# Altium PCB ESP32_LED_Matrix_Unrouted.PcbDoc
Units mm, origin at the board's own origin, x right, y up, seen from the top; angles counter-clockwise.
Board outline 83 x 52.3 mm, 2 copper layers (Top Layer, Bottom Layer), stack 1.671 mm thick; 168 components, 98 nets, 513 pads, 0 vias.
Unrouted connection lines stored in the file: 401.
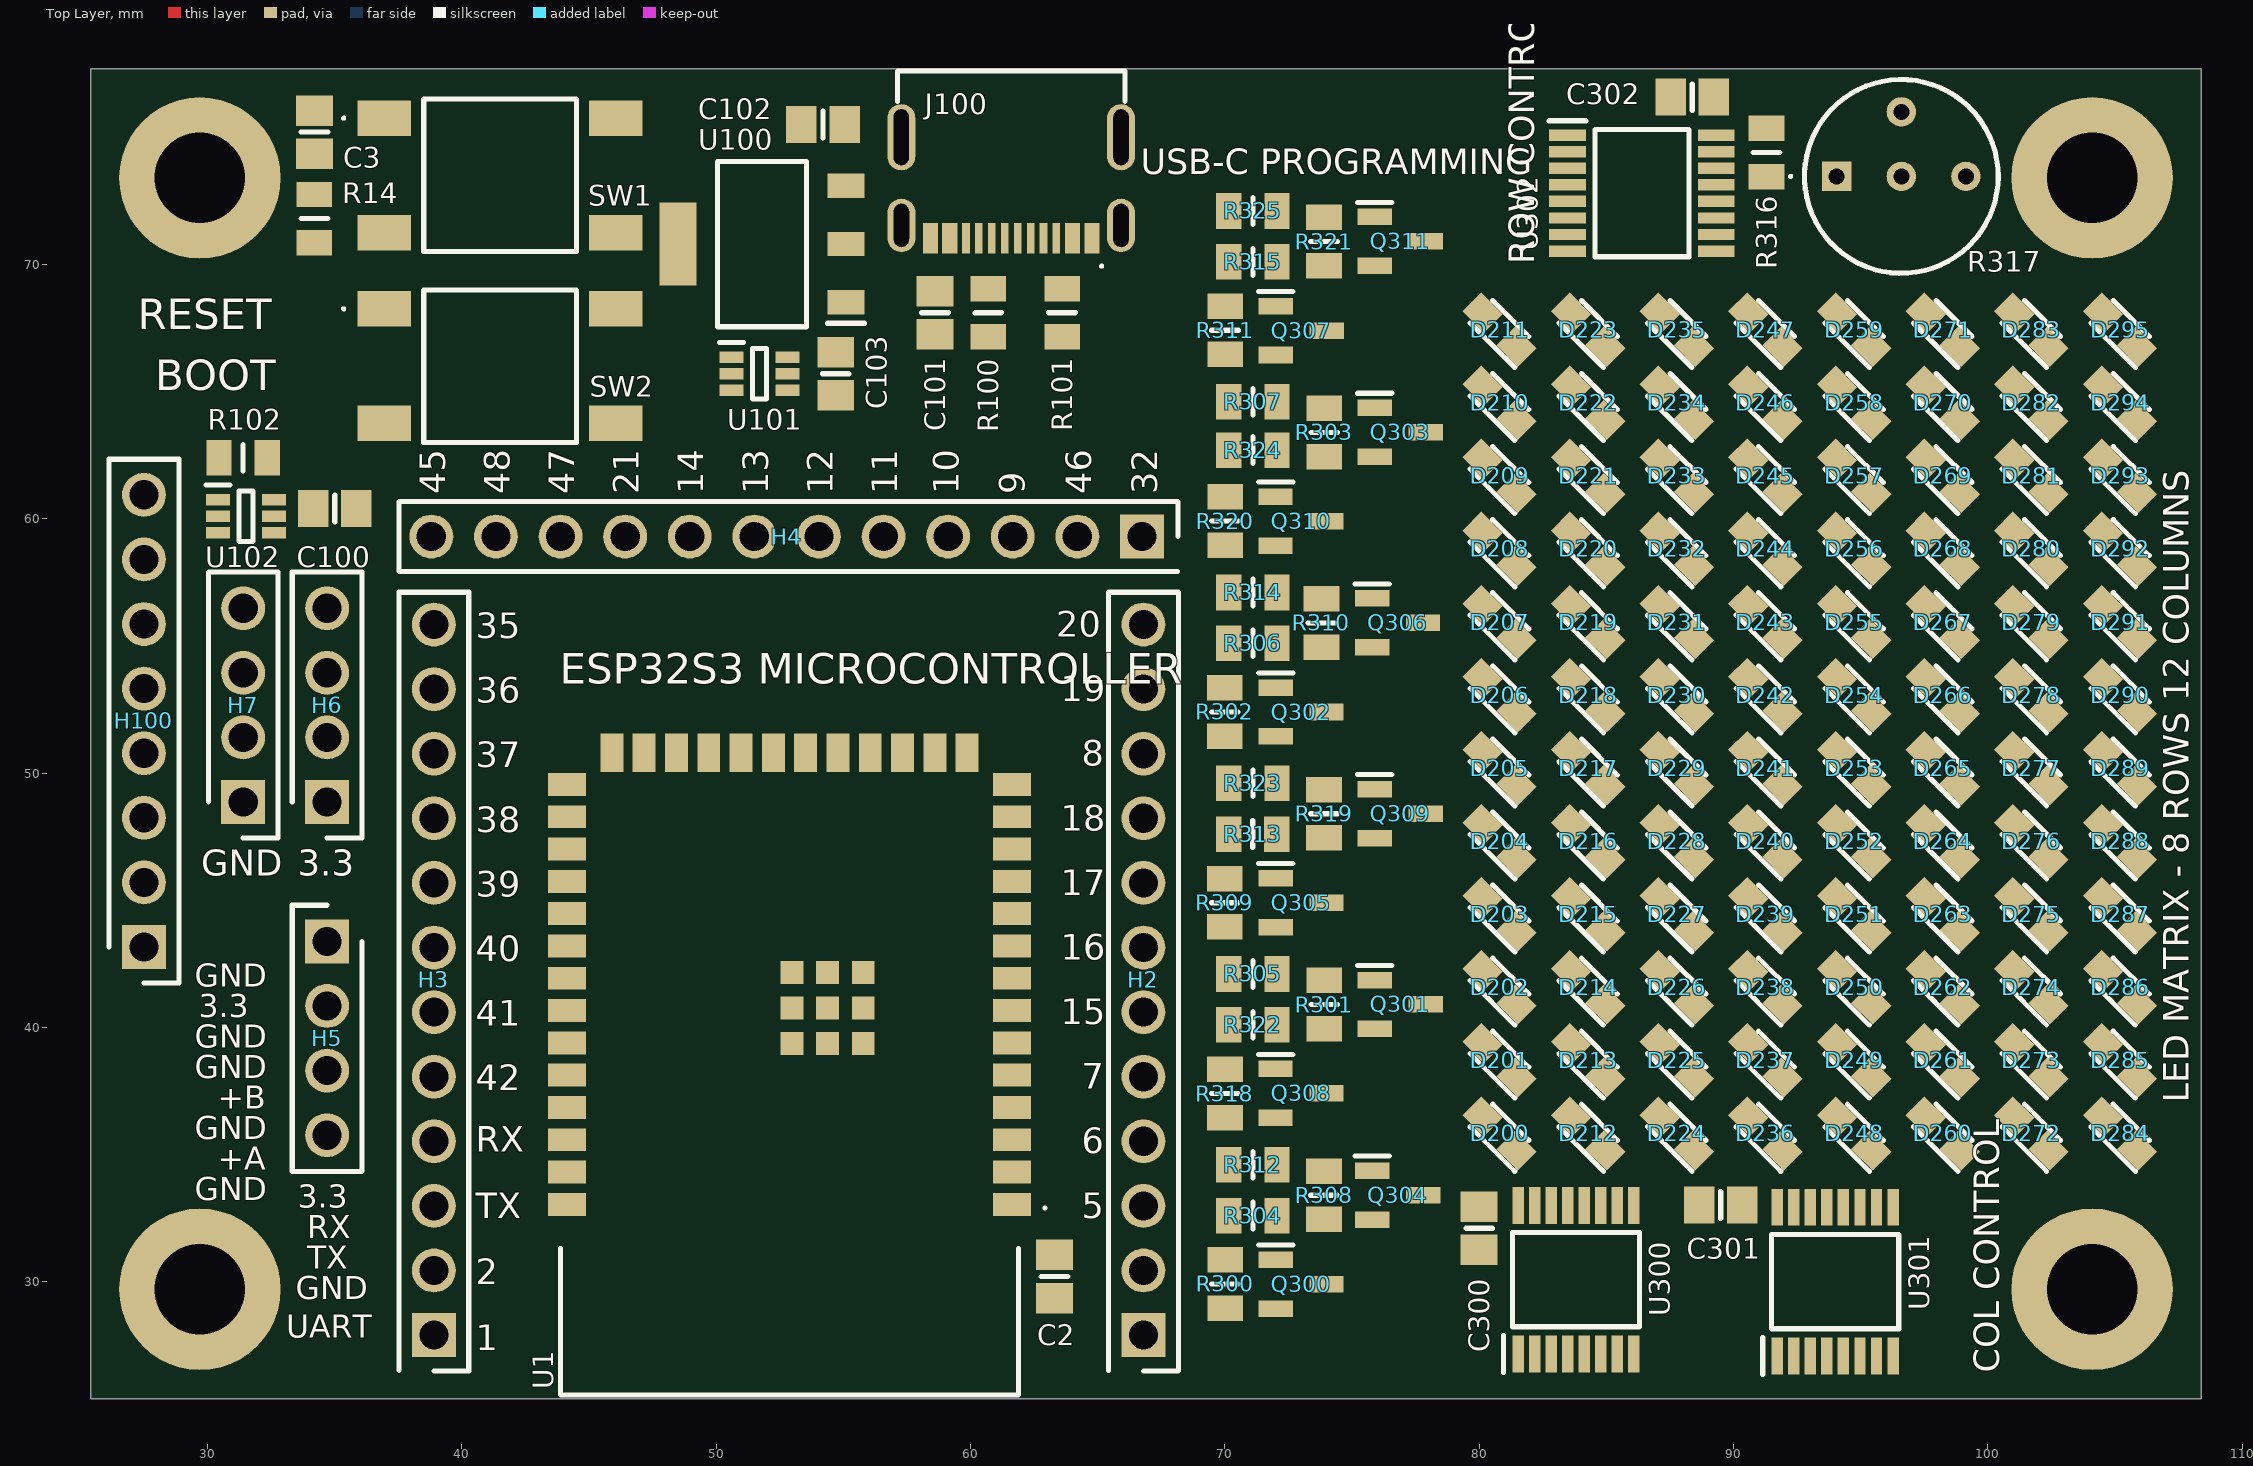
[diagram p0: Top Layer view]
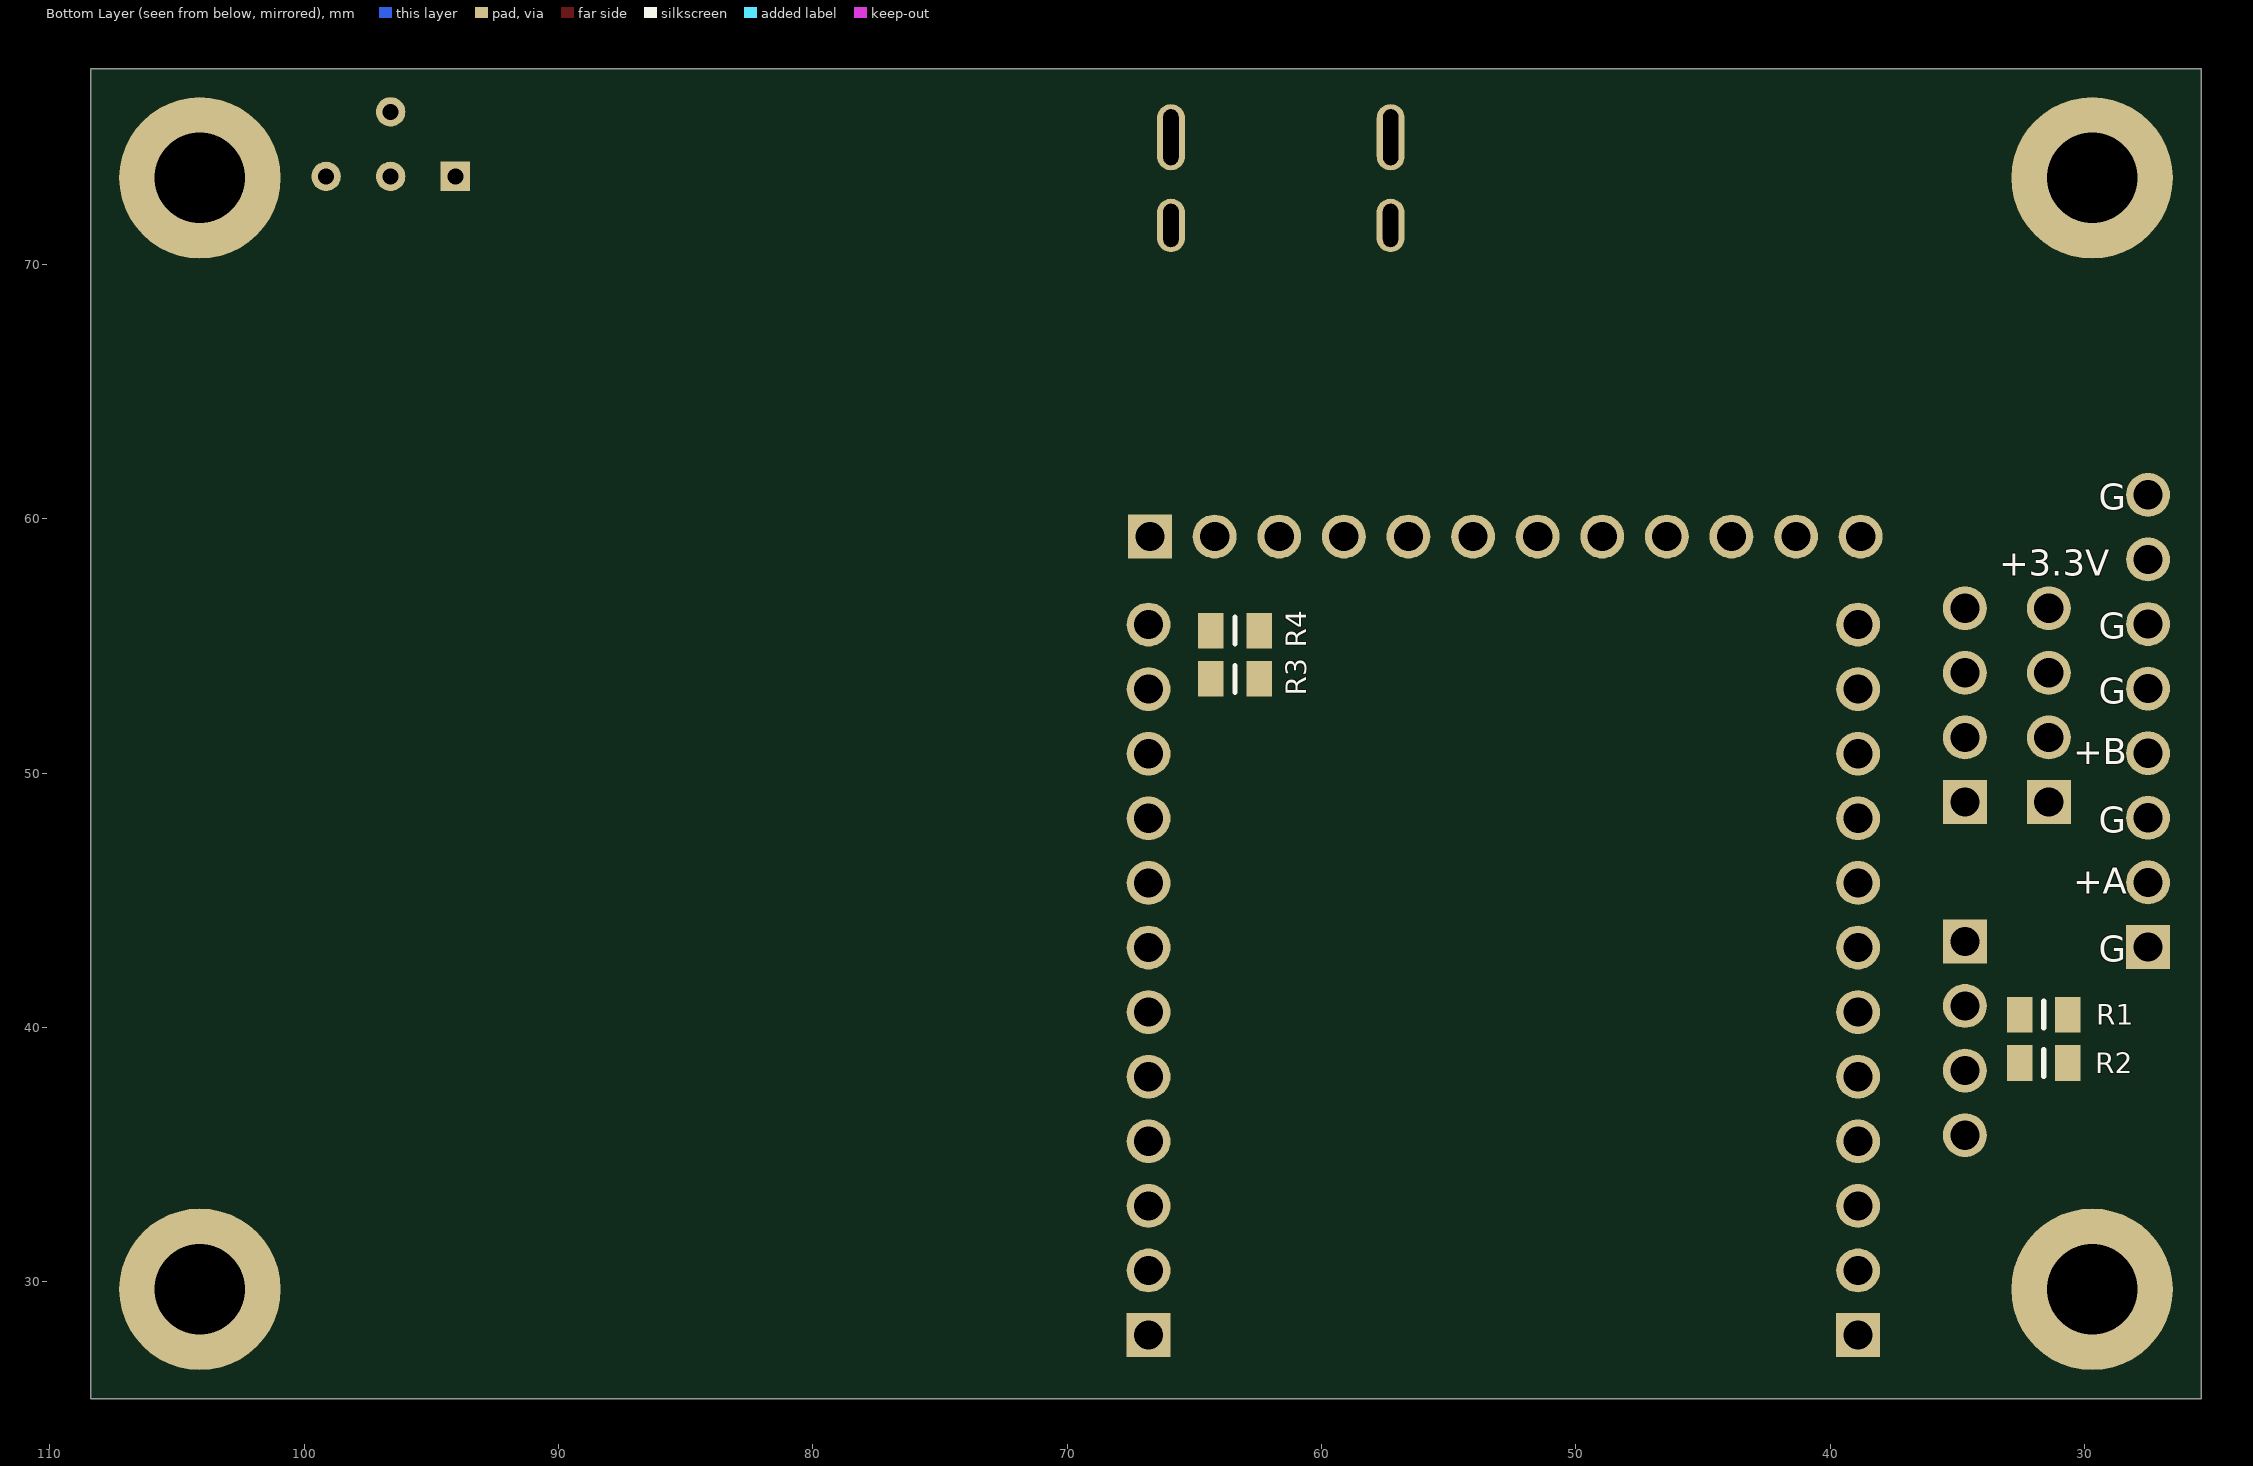
[diagram p1: Bottom Layer view, seen from below]

## Layer stack, top to bottom
Top Solder: solder mask 0.0102, Solder Resist, Dk 3.5
Top Layer: signal copper 0.0356
Dielectric 1: dielectric 1.6, FR-4, Dk 4.8
Bottom Layer: signal copper 0.0356
Bottom Solder: solder mask 0.0102, Solder Resist, Dk 3.5

## Board outline
25.4,25.4 108.4,25.4 108.4,77.7 25.4,77.7

## Design rules (kind name [scope] priority, off if disabled: settings)
Clearance [All] p1: gap=0.127 ignorepadtopadclearanceinfootprint=TRUE
ComponentClearance [All] p1: gap=0 collisioncheckmode=3 verticalgap=0.05 showdistances=FALSE
DiffPairsRouting [All] p1: maxlimit=0.254 minlimit=0.127 mostfreqgap=0.254 toplayer_minwidth=0.1 toplayer_maxwidth=0.5 toplayer_prefwidth=0.381 bottomlayer_minwidth=0.1 bottomlayer_maxwidth=0.5 bottomlayer_prefwidth=0.381 maxuncoupledlength=12.7
HoleSize [All] p1: absolutevalues=TRUE maxlimit=15 minlimit=0.025 maxpercent=80.000 minpercent=20.000
MinimumSolderMaskSliver [All] p1: minsoldermaskwidth=0
PolygonConnect [All] p1: connectstyle=Relief reliefconductorwidth=0.254 reliefentries=4 polygonreliefangle="90 Angle" airgapwidth=0.254
RoutingVias [All] p1: holewidth=0.35 width=0.7 viastyle="Through Hole" minholewidth=0.3 minwidth=0.6 maxholewidth=1 maxwidth=2
SilkToSilkClearance [All] p1: silktosilkclearance=0
SilkToSolderMaskClearance [IsPad] p1: minsilkscreentomaskgap=0 clearancetoexposedcopper=TRUE
SolderMaskExpansion [All] p1: expansion=0.102 istentingtop=FALSE
SupplyNets "Schematic Supply Nets_9" [InNet('V_MCU')] p1: voltage=0.000
SupplyNets "Schematic Supply Nets_8" [InNet('VCC_2')] p2: voltage=0.000
SupplyNets "Schematic Supply Nets_7" [InNet('VCC_1')] p3: voltage=0.000
SupplyNets "Schematic Supply Nets_6" [InNet('GND')] p4: voltage=0.000
SupplyNets "Schematic Supply Nets_4" [InNet('+3.3')] p5: voltage=0.000
Width [All] p1: maxlimit=2 minlimit=0.1 preferedwidth=0.254
24 further rules are at their usual default settings.

## Classes and differential pairs
net class ROW[0..7]: ROW0 ROW1 ROW2 ROW3 ROW4 ROW5 ROW6 ROW7
net class COL_SIG[0..11]: COL_SIG0 COL_SIG1 COL_SIG2 COL_SIG3 COL_SIG4 COL_SIG5 COL_SIG6 COL_SIG7 COL_SIG8 COL_SIG9 COL_SIG10 COL_SIG11
net class COL[0..11]: COL0 COL1 COL2 COL3 COL4 COL5 COL6 COL7 COL8 COL9 COL10 COL11
component class "Power Supply": C100 C101 C102 C103 H100 J100 R100 R101 R102 U100 U101 U102
component class Designator: C300 C301 C302 Q300 Q301 Q302 Q303 Q304 Q305 Q306 Q307 Q308 Q309 Q310 Q311 R300 R301 R302 R303 R304 R305 R306 R307 R308 R309 R310 R311 R312 R313 R314 R315 R316 R317 R318 R319 R320 R321 R322 R323 R324 R325 U300 U301 U302
component class Microcontroller: C2 C3 H2 H3 H4 H5 H6 H7 R1 R2 R3 R4 R14 SW1 SW2 U1
differential pair USB_D: +USB_D_P -USB_D_N

## Components (designator, comment, footprint, x,y, rotation, side; value= is the part's Value field where it differs from the comment)
C2 "100n" CAP0805 63.3,30.2 r270 top
C3 "1u" CAP0805 34.2,75.2 r90 top
C100 "100n" CAP0805 35,60.4 r0 top
C101 "100n" CAP0805 58.6,68.1 r270 top
C102 "100n" CAP0805 54.2,75.5 r180 top
C103 "100n" CAP0805 54.7,65.7 r270 top
C300 "100n" CAP0805 80,32.1 r270 top
C301 "100n" CAP0805 89.498,33.017 r180 top
C302 "100n" CAP0805 88.38,76.577 r180 top
D200 "LED" LEDM2012X80N 80.8,35.827 r135 top
D201 "LED" LEDM2012X80N 80.8,38.7 r135 top
D202 "LED" LEDM2012X80N 80.8,41.573 r135 top
D203 "LED" LEDM2012X80N 80.8,44.446 r135 top
D204 "LED" LEDM2012X80N 80.8,47.319 r135 top
D205 "LED" LEDM2012X80N 80.8,50.192 r135 top
D206 "LED" LEDM2012X80N 80.8,53.065 r135 top
D207 "LED" LEDM2012X80N 80.8,55.939 r135 top
D208 "LED" LEDM2012X80N 80.8,58.812 r135 top
D209 "LED" LEDM2012X80N 80.8,61.685 r135 top
D210 "LED" LEDM2012X80N 80.8,64.558 r135 top
D211 "LED" LEDM2012X80N 80.8,67.431 r135 top
D212 "LED" LEDM2012X80N 84.286,35.827 r135 top
D213 "LED" LEDM2012X80N 84.286,38.7 r135 top
D214 "LED" LEDM2012X80N 84.286,41.573 r135 top
D215 "LED" LEDM2012X80N 84.286,44.446 r135 top
D216 "LED" LEDM2012X80N 84.286,47.319 r135 top
D217 "LED" LEDM2012X80N 84.286,50.192 r135 top
D218 "LED" LEDM2012X80N 84.286,53.065 r135 top
D219 "LED" LEDM2012X80N 84.286,55.939 r135 top
D220 "LED" LEDM2012X80N 84.286,58.812 r135 top
D221 "LED" LEDM2012X80N 84.286,61.685 r135 top
D222 "LED" LEDM2012X80N 84.286,64.558 r135 top
D223 "LED" LEDM2012X80N 84.286,67.431 r135 top
D224 "LED" LEDM2012X80N 87.771,35.827 r135 top
D225 "LED" LEDM2012X80N 87.771,38.7 r135 top
D226 "LED" LEDM2012X80N 87.771,41.573 r135 top
D227 "LED" LEDM2012X80N 87.771,44.446 r135 top
D228 "LED" LEDM2012X80N 87.771,47.319 r135 top
D229 "LED" LEDM2012X80N 87.771,50.192 r135 top
D230 "LED" LEDM2012X80N 87.771,53.065 r135 top
D231 "LED" LEDM2012X80N 87.771,55.939 r135 top
D232 "LED" LEDM2012X80N 87.771,58.812 r135 top
D233 "LED" LEDM2012X80N 87.771,61.685 r135 top
D234 "LED" LEDM2012X80N 87.771,64.558 r135 top
D235 "LED" LEDM2012X80N 87.771,67.431 r135 top
D236 "LED" LEDM2012X80N 91.257,35.827 r135 top
D237 "LED" LEDM2012X80N 91.257,38.7 r135 top
D238 "LED" LEDM2012X80N 91.257,41.573 r135 top
D239 "LED" LEDM2012X80N 91.257,44.446 r135 top
D240 "LED" LEDM2012X80N 91.257,47.319 r135 top
D241 "LED" LEDM2012X80N 91.257,50.192 r135 top
D242 "LED" LEDM2012X80N 91.257,53.065 r135 top
D243 "LED" LEDM2012X80N 91.257,55.939 r135 top
D244 "LED" LEDM2012X80N 91.257,58.812 r135 top
D245 "LED" LEDM2012X80N 91.257,61.685 r135 top
D246 "LED" LEDM2012X80N 91.257,64.558 r135 top
D247 "LED" LEDM2012X80N 91.257,67.431 r135 top
D248 "LED" LEDM2012X80N 94.743,35.827 r135 top
D249 "LED" LEDM2012X80N 94.743,38.7 r135 top
D250 "LED" LEDM2012X80N 94.743,41.573 r135 top
D251 "LED" LEDM2012X80N 94.743,44.446 r135 top
D252 "LED" LEDM2012X80N 94.743,47.319 r135 top
D253 "LED" LEDM2012X80N 94.743,50.192 r135 top
D254 "LED" LEDM2012X80N 94.743,53.065 r135 top
D255 "LED" LEDM2012X80N 94.743,55.939 r135 top
D256 "LED" LEDM2012X80N 94.743,58.812 r135 top
D257 "LED" LEDM2012X80N 94.743,61.685 r135 top
D258 "LED" LEDM2012X80N 94.743,64.558 r135 top
D259 "LED" LEDM2012X80N 94.743,67.431 r135 top
D260 "LED" LEDM2012X80N 98.229,35.827 r135 top
D261 "LED" LEDM2012X80N 98.229,38.7 r135 top
D262 "LED" LEDM2012X80N 98.229,41.573 r135 top
D263 "LED" LEDM2012X80N 98.229,44.446 r135 top
D264 "LED" LEDM2012X80N 98.229,47.319 r135 top
D265 "LED" LEDM2012X80N 98.229,50.192 r135 top
D266 "LED" LEDM2012X80N 98.229,53.065 r135 top
D267 "LED" LEDM2012X80N 98.229,55.939 r135 top
D268 "LED" LEDM2012X80N 98.229,58.812 r135 top
D269 "LED" LEDM2012X80N 98.229,61.685 r135 top
D270 "LED" LEDM2012X80N 98.229,64.558 r135 top
D271 "LED" LEDM2012X80N 98.229,67.431 r135 top
D272 "LED" LEDM2012X80N 101.714,35.827 r135 top
D273 "LED" LEDM2012X80N 101.714,38.7 r135 top
D274 "LED" LEDM2012X80N 101.714,41.573 r135 top
D275 "LED" LEDM2012X80N 101.714,44.446 r135 top
D276 "LED" LEDM2012X80N 101.714,47.319 r135 top
D277 "LED" LEDM2012X80N 101.714,50.192 r135 top
D278 "LED" LEDM2012X80N 101.714,53.065 r135 top
D279 "LED" LEDM2012X80N 101.714,55.939 r135 top
D280 "LED" LEDM2012X80N 101.714,58.812 r135 top
D281 "LED" LEDM2012X80N 101.714,61.685 r135 top
D282 "LED" LEDM2012X80N 101.714,64.558 r135 top
D283 "LED" LEDM2012X80N 101.714,67.431 r135 top
D284 "LED" LEDM2012X80N 105.2,35.827 r135 top
D285 "LED" LEDM2012X80N 105.2,38.7 r135 top
D286 "LED" LEDM2012X80N 105.2,41.573 r135 top
D287 "LED" LEDM2012X80N 105.2,44.446 r135 top
D288 "LED" LEDM2012X80N 105.2,47.319 r135 top
D289 "LED" LEDM2012X80N 105.2,50.192 r135 top
D290 "LED" LEDM2012X80N 105.2,53.065 r135 top
D291 "LED" LEDM2012X80N 105.2,55.939 r135 top
D292 "LED" LEDM2012X80N 105.2,58.812 r135 top
D293 "LED" LEDM2012X80N 105.2,61.685 r135 top
D294 "LED" LEDM2012X80N 105.2,64.558 r135 top
D295 "LED" LEDM2012X80N 105.2,67.431 r135 top
H2 "Header" Header_1X12 66.8,27.9 r90 top
H3 "Header" Header_1X12 38.9,27.9 r90 top
H4 "Header" Header_1X12 66.74,59.3 r180 top
H5 "4-Pin Header" Header_1X4 34.7,43.38 r270 top
H6 "4-Pin Header" Header_1X4 34.7,48.86 r90 top
H7 "4-Pin Header" Header_1X4 31.4,48.86 r90 top
H100 "Header" Header_1X8 27.5,43.16 r90 top
J100 "USB C" "USB TYPE C 12 PIN" 61.6,74.2 r180 top
Q300 "SI2305" SOT23 73,29.9 r270 top
Q301 "SI2305" SOT23 76.9,40.9 r270 top
Q302 "SI2305" SOT23 73,52.4 r270 top
Q303 "SI2305" SOT23 76.9,63.4 r270 top
Q304 "SI2305" SOT23 76.8,33.4 r270 top
Q305 "SI2305" SOT23 73,44.9 r270 top
Q306 "SI2305" SOT23 76.795,55.905 r270 top
Q307 "SI2305" SOT23 73.003,67.397 r270 top
Q308 "SI2305" SOT23 72.995,37.405 r270 top
Q309 "SI2305" SOT23 76.9,48.4 r270 top
Q310 "SI2305" SOT23 72.995,59.905 r270 top
Q311 "SI2305" SOT23 76.895,70.905 r270 top
R1 "0" RESC0805 31.6,40.5 r180 bottom
R2 "0" RESC0805 31.6,38.6 r0 bottom
R3 "0" RESC0805 63.4,53.7 r180 bottom
R4 "0" RESC0805 63.4,55.6 r180 bottom
R14 "10k" RESC0805 34.2,71.8 r90 top
R100 "5.11k" RESC0805 60.7,68.1 r90 top
R101 "5.11k" RESC0805 63.6,68.1 r90 top
R102 "10k" RESC0805 31.4,62.4 r180 top
R300 "100k" RESC0805 70.01,29.91 r90 top
R301 "100k" RESC0805 73.905,40.895 r90 top
R302 "100k" RESC0805 69.995,52.405 r90 top
R303 "100k" RESC0805 73.905,63.395 r90 top
R304 "10k" RESC0805 71.1,32.6 r0 top
R305 "10k" RESC0805 71.1,42.1 r0 top
R306 "10k" RESC0805 71.1,55.1 r0 top
R307 "10k" RESC0805 71.1,64.6 r0 top
R308 "100k" RESC0805 73.9,33.4 r90 top
R309 "100k" RESC0805 70,44.9 r90 top
R310 "100k" RESC0805 73.8,55.9 r90 top
R311 "100k" RESC0805 70.01,67.41 r90 top
R312 "10k" RESC0805 71.1,34.6 r0 top
R313 "10k" RESC0805 71.096,47.6 r0 top
R314 "10k" RESC0805 71.1,57.1 r0 top
R315 "10k" RESC0805 71.1,70.1 r0 top
R316 "1k" RESC0805 91.3,74.4 r270 top
R317 "50k" 3339P1103LF 94.06,73.46 r0 top
R318 "100k" RESC0805 70.005,37.395 r90 top
R319 "100k" RESC0805 73.9,48.4 r90 top
R320 "100k" RESC0805 70.01,59.91 r90 top
R321 "100k" RESC0805 73.9,70.9 r90 top
R322 "10k" RESC0805 71.1,40.1 r0 top
R323 "10k" RESC0805 71.1,49.6 r0 top
R324 "10k" RESC0805 71.1,62.7 r0 top
R325 "10k" RESC0805 71.1,72.1 r0 top
SW1 "TS04-66-73-BK-100-SMT" "Tactile Button 6.0mm x 6.0mm" 41.5,73.5 r0 top
SW2 "TS04-66-73-BK-100-SMT" "Tactile Button 6.0mm x 6.0mm" 41.5,66 r0 top
U1 "ESP32-S3-WROOM-1-N8" ESP32-S3-WROOM-1-N8 52.5,38.3 r180 top
U100 "AZ1117CH2-3.3TRG1" SOT223 51.8,70.8 r180 top
U101 "LM66100DCKR" SC70-6 51.7,65.7 r0 top
U102 "LM66100DCKR" SC70-6 31.512,60.098 r0 top
U300 "74HC595" TSSOP16 83.805,30.077 r90 top
U301 "74HC595" TSSOP16 94,30 r90 top
U302 "STP08DP05TTR" TSSOP16 86.4,72.8 r0 top

## Footprints (in the part's own frame and the unit in brackets; to place one, negate y for a bottom-side part, rotate by r counter-clockwise, add the part's x,y. Pads: shape width x height; smd on the part's side, far side on the other; paste and mask are expansions set on the pad)
3339P1103LF [mm]
  rect 1.155x1.155 hole 0.63: 1(0,0)
  round 1.155 hole 0.63: 2(2.54,0) 2(2.54,2.54) 3(5.08,0)
  silkscreen extent -1.86,-3.81 6.35,3.81, body extent -1.27,-3.81 6.35,3.81, height 6.42
CAP0805 [mm] "Chip Capacitor, 2-Leads, Body 2.00x1.20mm, IPC Medium Density"
  rect 1.2x1.45 smd: 1(-0.85,0) 2(0.85,0)
  silkscreen extent 0,-0.53 0,0.53, body extent -1,-0.63 1,0.63, height 1.1
ESP32-S3-WROOM-1-N8 [mm]
  rect 1.5x0.9 smd: 1(-9.131,5.26) 2(-9.131,3.99) 3(-9.131,2.72) 4(-9.131,1.45) 5(-9.131,0.18) 6(-9.131,-1.09) 7(-9.131,-2.36) 8(-9.131,-3.63) 9(-9.131,-4.9) 10(-9.131,-6.17) 11(-9.131,-7.44) 12(-9.131,-8.71) 13(-9.131,-9.98) 14(-9.131,-11.25) 27(8.369,-11.25) 28(8.369,-9.98) 29(8.369,-8.71) 30(8.369,-7.44) 31(8.369,-6.17) 32(8.369,-4.9) 33(8.369,-3.63) 34(8.369,-2.36) 35(8.369,-1.09) 36(8.369,0.18) 37(8.369,1.45) 38(8.369,2.72) 39(8.369,3.99) 40(8.369,5.26)
  rect 0.9x1.5 smd: 15(-7.366,-12.5) 16(-6.096,-12.5) 17(-4.826,-12.5) 18(-3.556,-12.5) 19(-2.286,-12.5) 20(-1.016,-12.5) 21(0.254,-12.5) 22(1.524,-12.5) 23(2.794,-12.5) 24(4.064,-12.5) 25(5.334,-12.5) 26(6.604,-12.5)
  rect 0.9x0.9 smd: 41(-1.881,-2.46) 42(-1.881,-1.06) 43(-3.281,-1.06) 44(-3.281,-2.46) 45(-3.281,-3.86) 46(-1.881,-3.86) 47(-0.481,-3.86) 48(-0.481,-2.46) 49(-0.481,-1.06)
  silkscreen extent -10.48,5.35 8.62,12.75, body extent -9.38,-12.75 8.62,12.75, height 2.7
Header_1X4 [mm]
  rect 1.725x1.725 hole 1.15: 1(0,0)
  round 1.725 hole 1.15: 2(2.54,0) 3(5.08,0) 4(7.62,0)
  silkscreen extent -1.42,-1.37 9.04,1.37
Header_1X8 [mm]
  rect 1.725x1.725 hole 1.15: 1(0,0)
  round 1.725 hole 1.15: 2(2.54,0) 3(5.08,0) 4(7.62,0) 5(10.16,0) 6(12.7,0) 7(15.24,0) 8(17.78,0)
  silkscreen extent -1.42,-1.37 19.18,1.37
Header_1X12 [mm]
  rect 1.725x1.725 hole 1.15: 1(0,0)
  round 1.725 hole 1.15: 2(2.54,0) 3(5.08,0) 4(7.62,0) 5(10.16,0) 6(12.7,0) 7(15.24,0) 8(17.78,0) 9(20.32,0) 10(22.86,0) 11(25.4,0) 12(27.94,0)
  silkscreen extent -1.42,-1.37 29.21,1.37
LEDM2012X80N [mm]
  rect 1.2x1.05 smd: 1(-0.95,0) 2(0.95,0)
  silkscreen extent -1.47,-0.62 1,0.63, body extent -1,-0.62 1,0.62, height 0.7
RESC0805 [mm] "Chip Resistor, 2-Leads, Body 2.00x1.20mm, IPC Medium Density"
  rect 1x1.4 smd: 1(-0.95,0) 2(0.95,0)
  silkscreen extent 0,-0.53 0,0.53, body extent -1,-0.63 1,0.63, height 0.5
SC70-6 [mm]
  rect 0.95x0.45 smd: 1(-1.1,0.65) 2(-1.1,0) 3(-1.1,-0.65) 4(1.1,-0.65) 5(1.1,0) 6(1.1,0.65)
  silkscreen extent -1.58,-1 0.28,1.22, body extent -1.05,-1 1.05,1, height 1
SOT23 [mm]
  rect 0.65x1.35 smd: 1(-0.96,-1) 2(0.96,-1) 3(0,1)
  silkscreen extent -1.54,-1.68 -1.54,-0.33, body extent -1.45,-1.2 1.45,1.2, height 0.95
SOT223 [mm]
  rect 1.45x0.95 smd: 1(-3.3,2.29) 2(-3.3,0) 3(-3.3,-2.29)
  rect 1.45x3.25 smd: 4(3.3,0)
  silkscreen extent -4.03,-3.25 1.75,3.25, body extent -3.35,-3.15 3.35,3.15, height 1.8
"Tactile Button 6.0mm x 6.0mm" [mm]
  rect 2.1x1.4 smd: 1(-4.55,2.25) 2(4.55,2.25) 3(-4.55,-2.25) 4(4.55,-2.25)
  silkscreen extent -6.2,-3 3,3, body extent -5,-3 5,3, height 7.4
TSSOP16 [mm]
  rect 1.45x0.45 smd: 1(-2.925,2.275) 2(-2.925,1.625) 3(-2.925,0.975) 4(-2.925,0.325) 5(-2.925,-0.325) 6(-2.925,-0.975) 7(-2.925,-1.625) 8(-2.925,-2.275) 9(2.925,-2.275) 10(2.925,-1.625) 11(2.925,-0.975) 12(2.925,-0.325) 13(2.925,0.325) 14(2.925,0.975) 15(2.925,1.625) 16(2.925,2.275)
  silkscreen extent -3.65,-2.5 1.85,2.85, body extent -3.2,-2.5 3.2,2.5, height 1.2
"USB TYPE C 12 PIN" [mm]
  oval 1.1x2.6 hole 0.6 slot 2.2 at 90 deg: 1(-4.32,-0.8) 16(4.32,-0.8)
  oval 1.1x2.1 hole 0.6 slot 1.7 at 90 deg: 2(-4.318,2.667) 15(4.318,2.667)
  rect 0.6x1.2 smd: 3(3.175,3.175) 4(2.413,3.175) 13(-2.413,3.175) 14(-3.175,3.175)
  rect 0.3x1.2 smd: 5(1.778,3.175) 6(1.27,3.175) 7(0.762,3.175) 8(0.254,3.175) 9(-0.254,3.175) 10(-0.762,3.175) 11(-1.27,3.175) 12(-1.778,3.175)
  silkscreen extent -4.47,-3.4 4.47,4.32, body extent -4.34,-3.47 4.6,3.43, height 3.26

## Part data
C2 C3 C100 C101 C102 C103 C300 C301 C302: library part "Capacitor - Non Polarized", "Non Polarized Capacitor"
D200 D201 D202 D203 D204 D205 D206 D207 D208 D209 D210 D211 D212 D213 D214 D215 D216 D217 D218 D219 D220 D221 D222 D223 D224 D225 D226 D227 D228 D229 D230 D231 D232 D233 D234 D235 D236 D237 D238 D239 D240 D241 D242 D243 D244 D245 D246 D247 D248 D249 D250 D251 D252 D253 D254 D255 D256 D257 D258 D259 D260 D261 D262 D263 D264 D265 D266 D267 D268 D269 D270 D271 D272 D273 D274 D275 D276 D277 D278 D279 D280 D281 D282 D283 D284 D285 D286 D287 D288 D289 D290 D291 D292 D293 D294 D295: "General Purpose LED", ComponentLink1Description=Datasheet, ComponentLink1URL=https://www.smc-diodes.com/propdf/1N4148W%20N0571%20REV.E.pdf
H2 H3 H4: library part "12-Pin Header", "12-Pin Header"
H100: library part "8-Pin Header", "8-Pin Header", System=Connector
J100: library part "USB Type C Connector 12 Pin"
Q300 Q301 Q302 Q303 Q304 Q305 Q306 Q307 Q308 Q309 Q310 Q311: "General Purpose P-Channel MOSFET", ComponentLink1Description=Datasheet, ComponentLink1URL=https://www.vishay.com/docs/64847/si2305cd.pdf
R1 R2 R3 R4 R14 R100 R101 R102 R300 R301 R302 R303 R304 R305 R306 R307 R308 R309 R310 R311 R312 R313 R314 R315 R316 R318 R319 R320 R321 R322 R323 R324 R325: library part Resistor, "Resistor"
R317: library part Potentiometer, "Potentionmeter"
SW1 SW2: "Switch", Manufacturer_Name="Same Sky", Mouser Part Number=179-TS046673BK100SMT, Arrow Part Number=TS04-66-73-BK-100-SMT, Arrow Price/Stock=https://www.arrow.com/en/products/ts04-66-73-bk-100-smt/cui-devices?utm_currency=USD&region=nac, Datasheet Link=https://www.sameskydevices.com/product/resource/supplyframepdf/ts04.pdf, Height=7.6mm, Manufacturer_Part_Number=TS04-66-73-BK-100-SMT, Mouser Price/Stock=https://www.mouser.co.uk/ProductDetail/Same-Sky/TS04-66-73-BK-100-SMT?qs=A6eO%252BMLsxmRAmp3wqRUzZw%3D%3D
U1: "ESP32 Microcontroller with Bluetooth and Wifi"
U100: library part AZ1117CH2-3.3TRG1_1, "3.3V Linear Voltage Regulator"
U101 U102: "5.5-V, 1.5-A 79-mΩ, Low IQ Ideal Diode With Input Polarity Protection", Manufacturer_Name="Texas Instruments", Mouser Part Number=595-LM66100DCKR, Arrow Part Number=LM66100DCKR, Arrow Price/Stock=https://www.arrow.com/en/products/lm66100dckr/texas-instruments?region=nac, Datasheet Link=http://www.ti.com/lit/gpn/LM66100, Height=1.1mm, Manufacturer_Part_Number=LM66100DCKR, Mouser Price/Stock=https://www.mouser.co.uk/ProductDetail/Texas-Instruments/LM66100DCKR?qs=vLWxofP3U2y2yPPrXoBBoA%3D%3D
U300 U301: "Shift Register"
U302: "LED Driver", Manufacturer_Name=STMicroelectronics, Mouser Part Number=511-STP08DP05TTR, Arrow Part Number=STP08DP05TTR, Arrow Price/Stock=https://www.arrow.com/en/products/stp08dp05ttr/stmicroelectronics?region=nac, Datasheet Link=https://componentsearchengine.com/Datasheets/2/STP08DP05TTR.pdf, Height=1.2mm, Manufacturer_Part_Number=STP08DP05TTR, Mouser Price/Stock=https://www.mouser.co.uk/ProductDetail/STMicroelectronics/STP08DP05TTR?qs=xgiOkRdDJ0m7T%2FaY25F5vQ%3D%3D

## Free pads (board coordinates)
  round 6.35 hole 3.556: 7(29.7,29.7) 7(29.7,73.4) 7(104.1,29.7) 7(104.1,73.4)

## Nets (pads, with @x,y where several pads share a name; then routed paths per layer and width w, separated by ;. In a path a pad name is that pad's centre, name@x,y a point inside that pad or via, vN(x,y) a via of type N, cw(c..) or ccw(c..) an arc to the next point about the centre after c; other vN are vias at no path point)
+3.3: C2.1 C100.1 C103.1 C300.1 C301.1 C302.1 H2.1 H5.1 H6.1 H6.2 H6.3 H6.4 R14.1 U1.2 U101.6 U102.6 U300.10 U300.16 U301.10 U301.16 U302.16
COL0: D200.2 D212.2 D224.2 D236.2 D248.2 D260.2 D272.2 D284.2 Q300.3
COL1: D201.2 D213.2 D225.2 D237.2 D249.2 D261.2 D273.2 D285.2 Q304.3
COL2: D202.2 D214.2 D226.2 D238.2 D250.2 D262.2 D274.2 D286.2 Q308.3
COL3: D203.2 D215.2 D227.2 D239.2 D251.2 D263.2 D275.2 D287.2 Q301.3
COL4: D204.2 D216.2 D228.2 D240.2 D252.2 D264.2 D276.2 D288.2 Q305.3
COL5: D205.2 D217.2 D229.2 D241.2 D253.2 D265.2 D277.2 D289.2 Q309.3
COL6: D206.2 D218.2 D230.2 D242.2 D254.2 D266.2 D278.2 D290.2 Q302.3
COL7: D207.2 D219.2 D231.2 D243.2 D255.2 D267.2 D279.2 D291.2 Q306.3
COL8: D208.2 D220.2 D232.2 D244.2 D256.2 D268.2 D280.2 D292.2 Q310.3
COL9: D209.2 D221.2 D233.2 D245.2 D257.2 D269.2 D281.2 D293.2 Q303.3
COL10: D210.2 D222.2 D234.2 D246.2 D258.2 D270.2 D282.2 D294.2 Q307.3
COL11: D211.2 D223.2 D235.2 D247.2 D259.2 D271.2 D283.2 D295.2 Q311.3
COL_DS: H2.5 U1.7 U300.14
COL_OE: H2.4 U1.6 U300.13 U301.13
COL_SH_CP: H2.2 U1.4 U300.11 U301.11
COL_SIG0: R304.1 U300.1
COL_SIG1: R312.1 U300.2
COL_SIG2: R322.1 U300.3
COL_SIG3: R305.1 U300.4
COL_SIG4: R313.1 U300.5
COL_SIG5: R323.1 U300.6
COL_SIG6: R306.1 U300.7
COL_SIG7: R314.1 U301.1
COL_SIG8: R324.1 U301.2
COL_SIG9: R307.1 U301.3
COL_SIG10: R315.1 U301.4
COL_SIG11: R325.1 U301.5
COL_ST_CP: H2.3 U1.5 U300.12 U301.12
EXT_SUPP_EN: R102.1 U101.3 U102.5
GND: C2.2 C3.2 C100.2 C101.2 C102.2 C103.2 C300.2 C301.2 C302.2 H5.4 H7.1 H7.2 H7.3 H7.4 H100.1 H100.3 H100.5 H100.6 H100.8 J100.1 J100.2 J100.3 J100.14 J100.15 J100.16 R100.1 R101.1 R317.3 SW1.1 SW1.2 SW2.1 SW2.2 U1.1 U1.40 U1.41 U1.42 U1.43 U1.44 U1.45 U1.46 U1.47 U1.48 U1.49 U100.2 U100.4 U101.2 U101.5 U102.2 U300.8 U301.8 U302.1
GPIO1: H3.1 U1.39
GPIO2: H3.2 U1.38
GPIO3: H4.1 U1.15
GPIO8: H2.10 U1.12
GPIO9: H4.3 U1.17
GPIO10: H4.4 U1.18
GPIO11: H4.5 U1.19
GPIO12: H4.6 U1.20
GPIO13: H4.7 U1.21
GPIO14: H4.8 U1.22
GPIO15: H2.6 U1.8 U302.3
GPIO16: H2.7 U1.9 U302.4
GPIO17: H2.8 U1.10 U302.13
GPIO18: H2.9 U1.11 U302.2
GPIO19: H2.11 R3.1
GPIO20: H2.12 R4.1
GPIO21: H4.9 U1.23
GPIO35: H3.12 U1.28
GPIO36: H3.11 U1.29
GPIO37: H3.10 U1.30
GPIO38: H3.9 U1.31
GPIO39: H3.8 U1.32
GPIO40: H3.7 U1.33
GPIO41: H3.6 U1.34
GPIO42: H3.5 U1.35
GPIO45: H4.12 U1.26
GPIO46: H4.2 U1.16
GPIO47: H4.10 U1.24
GPIO48: H4.11 U1.25
MCU_BOOT: SW2.3 SW2.4 U1.27
MCU_EN: C3.1 R14.2 SW1.3 SW1.4 U1.3
NetC101_1: C101.1 J100.4 J100.13 U100.1
NetH5_2: H5.2 R1.2
NetH5_3: H5.3 R2.2
NetJ100_5: J100.5 R100.2
NetJ100_11: J100.11 R101.2
NetQ300_1: Q300.1 R300.2 R304.2
NetQ301_1: Q301.1 R301.2 R305.2
NetQ302_1: Q302.1 R302.2 R306.2
NetQ303_1: Q303.1 R303.2 R307.2
NetQ304_1: Q304.1 R308.2 R312.2
NetQ305_1: Q305.1 R309.2 R313.2
NetQ306_1: Q306.1 R310.2 R314.2
NetQ307_1: Q307.1 R311.2 R315.2
NetQ308_1: Q308.1 R318.2 R322.2
NetQ309_1: Q309.1 R319.2 R323.2
NetQ310_1: Q310.1 R320.2 R324.2
NetQ311_1: Q311.1 R321.2 R325.2
NetR316_1: R316.1 U302.15
NetR316_2: R316.2 R317.1 R317.2
NetU300_9: U300.9 U301.14
ROW0: D200.1 D201.1 D202.1 D203.1 D204.1 D205.1 D206.1 D207.1 D208.1 D209.1 D210.1 D211.1 U302.5
ROW1: D212.1 D213.1 D214.1 D215.1 D216.1 D217.1 D218.1 D219.1 D220.1 D221.1 D222.1 D223.1 U302.6
ROW2: D224.1 D225.1 D226.1 D227.1 D228.1 D229.1 D230.1 D231.1 D232.1 D233.1 D234.1 D235.1 U302.7
ROW3: D236.1 D237.1 D238.1 D239.1 D240.1 D241.1 D242.1 D243.1 D244.1 D245.1 D246.1 D247.1 U302.8
ROW4: D248.1 D249.1 D250.1 D251.1 D252.1 D253.1 D254.1 D255.1 D256.1 D257.1 D258.1 D259.1 U302.9
ROW5: D260.1 D261.1 D262.1 D263.1 D264.1 D265.1 D266.1 D267.1 D268.1 D269.1 D270.1 D271.1 U302.10
ROW6: D272.1 D273.1 D274.1 D275.1 D276.1 D277.1 D278.1 D279.1 D280.1 D281.1 D282.1 D283.1 U302.11
ROW7: D284.1 D285.1 D286.1 D287.1 D288.1 D289.1 D290.1 D291.1 D292.1 D293.1 D294.1 D295.1 U302.12
UPDI_RX: H3.4 R1.1 U1.36
UPDI_TX: H3.3 R2.1 U1.37
USB_D_N: J100.8 J100.10 R3.2 U1.13
USB_D_P: J100.7 J100.9 R4.2 U1.14
USB_SUPP_EN: C102.1 U100.3 U101.1 U102.3
V_MCU: H100.7 R102.2 U102.1
VCC_1: H100.2 Q300.2 Q301.2 Q302.2 Q303.2 Q304.2 Q305.2 Q306.2 Q307.2 Q308.2 Q309.2 Q310.2 Q311.2 R300.1 R301.1 R302.1 R303.1 R308.1 R309.1 R310.1 R311.1 R318.1 R319.1 R320.1 R321.1
VCC_2: H100.4
pads on no net: J100.6 J100.12 U101.4 U102.4 U300.15 U301.6 U301.7 U301.9 U301.15 U302.14

## Other copper
Top Layer:
  pour cut-out: 43.8,25.4 43.8,31.3 62,31.3 62,25.4
  pour cut-out: 66.74,59.3 38.8,59.3 38.8,59.06 38.74,59 66.74,59
  pour cut-out: 66.8,27.9 66.8,55.84 66.56,55.84 66.5,55.9 66.5,27.9
  pour cut-out: 38.9,27.9 38.9,55.84 39.14,55.84 39.2,55.9 39.2,27.9
  pour cut-out: 106.8,69.5 106.8,34 79.2,34 79.2,69.5
  pour cut-out: 106.8,69.5 106.8,34 79.2,34 79.2,69.5
Bottom Layer:
  pour cut-out: 43.8,25.4 43.8,31.3 62,31.3 62,25.4

## Silkscreen, mask and mechanical layers (free items; w line width, h text height)
Top Overlay:
  text "USB-C PROGRAMMING" at 66.697,73.543 h1
  text "ROW CONTROL" at 82.157,70.013 h1 r90
  text "RESET" at 27.247,67.446 h1.2
  text "BOOT" at 27.946,65.046 h1.2
  text "45" at 39.34,60.954 h1 r90
  text "48" at 41.88,60.954 h1 r90
  text "47" at 44.42,60.954 h1 r90
  text "21" at 46.96,60.954 h1 r90
  text "14" at 49.5,60.954 h1 r90
  text "13" at 52.04,60.954 h1 r90
  text "12" at 54.58,60.954 h1 r90
  text "11" at 57.12,60.954 h1 r90
  text "10" at 59.54,60.954 h1 r90
  text "9" at 62.14,60.954 h1 r90
  text "46" at 64.74,60.954 h1 r90
  text "32" at 67.34,60.954 h1 r90
  text "20" at 63.379,55.36 h1
  text "35" at 40.554,55.3 h1
  text "ESP32S3 MICROCONTROLLER" at 43.848,53.521 h1.2
  text "19" at 63.546,52.82 h1
  text "36" at 40.554,52.76 h1
  text "8" at 64.379,50.28 h1
  text "37" at 40.554,50.22 h1
  text "18" at 63.546,47.74 h1
  text "38" at 40.554,47.68 h1
  text "GND" at 29.754,45.954 h1.02
  text "3.3" at 33.554,45.954 h1.02
  text "17" at 63.546,45.2 h1
  text "39" at 40.554,45.14 h1
  text "16" at 63.546,42.66 h1
  text "40" at 40.554,42.6 h1
  text "GND" at 29.501,41.6 h0.9
  text "3.3" at 29.651,40.4 h0.9
  text "15" at 63.546,40.12 h1
  text "41" at 40.554,40.06 h1
  text "GND" at 29.501,39.2 h0.9
  text "GND" at 29.501,38 h0.9
  text "7" at 64.379,37.58 h1
  text "42" at 40.554,37.52 h1
  text "LED MATRIX - 8 ROWS 12 COLUMNS" at 107.9,37.038 h1 r90
  text "+B" at 30.4,36.8 h0.9
  text "GND" at 29.501,35.6 h0.9
  text "RX" at 40.554,35.1 h1
  text "6" at 64.379,35.04 h1
  text "+A" at 30.4,34.4 h0.9
  text "GND" at 29.501,33.2 h0.9
  text "3.3" at 33.551,32.9 h0.9
  text "TX" at 40.554,32.5 h1
  text "5" at 64.379,32.5 h1
  text "RX" at 33.926,31.7 h0.9
  text "TX" at 33.926,30.5 h0.9
  text "2" at 40.554,29.9 h1
  text "GND" at 33.476,29.3 h0.9
  text "UART" at 33.101,27.8 h0.9
  text "1" at 40.554,27.3 h1
  text "COL CONTROL" at 100.457,26.413 h1 r90
Bottom Overlay:
  text "G" at 29.446,60.354 h1.02
  text "+3.3V" at 33.346,57.754 h1.02
  text "G" at 29.446,55.274 h1.02
  text "G" at 29.446,52.734 h1.02
  text "+B" at 30.446,50.354 h1.02
  text "G" at 29.446,47.654 h1.02
  text "+A" at 30.446,45.254 h1.02
  text "G" at 29.446,42.574 h1.02